# Altium PCB BBB_Board_PLANES.PcbDoc (part 1 of 3)
Units mil, origin at the board's own origin, x right, y up, seen from the top; angles counter-clockwise.
Board outline 11000 x 5000 mil, 2 copper layers (Top Layer, Bottom Layer); 90 components, 379 nets, 1020 pads, 470 vias.
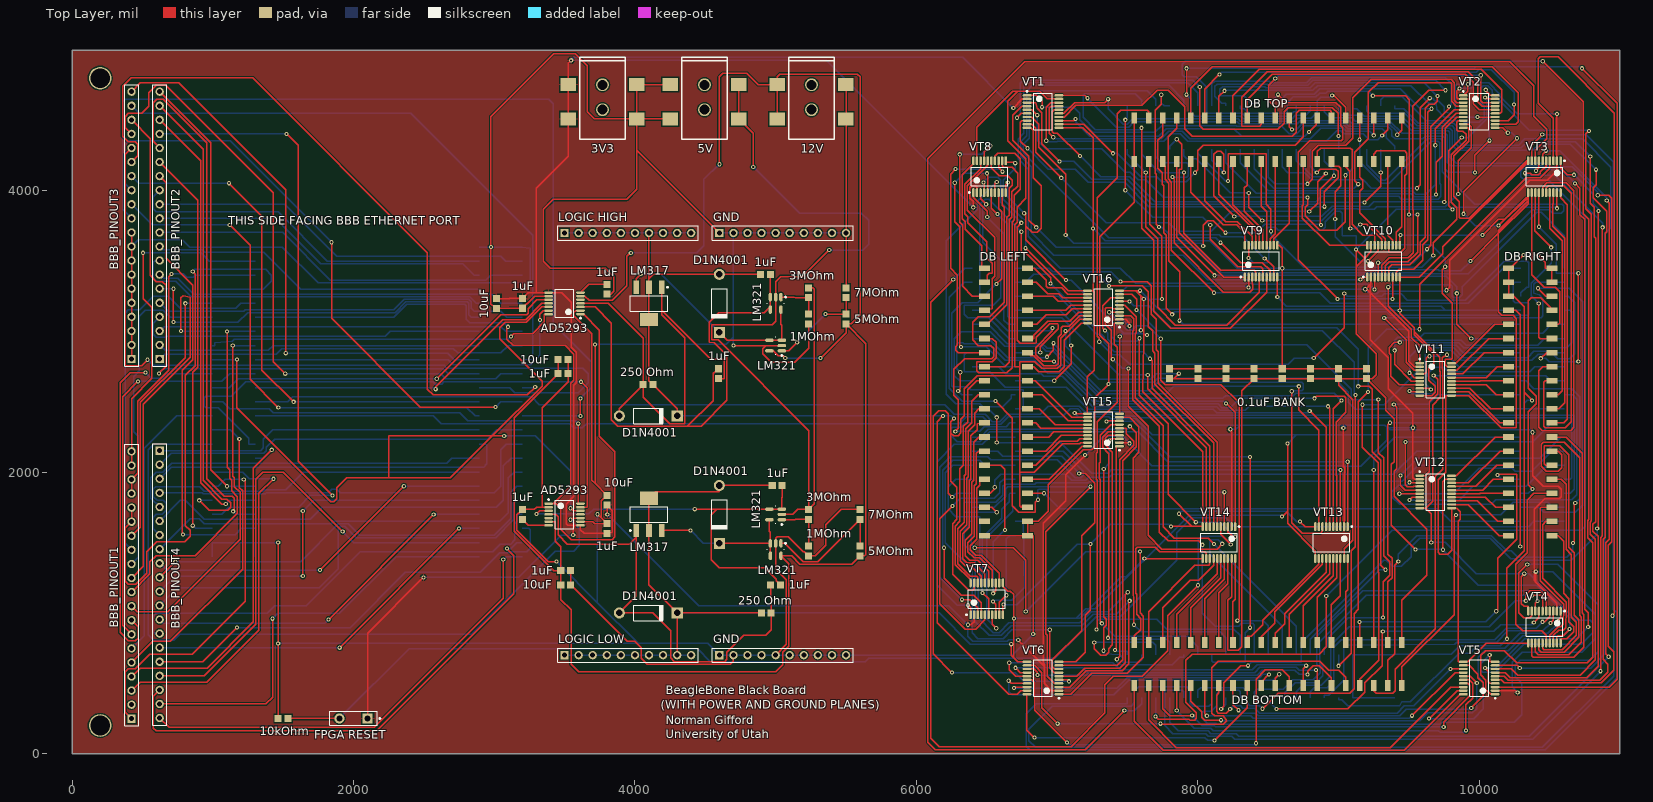
[diagram p0: Top Layer view]
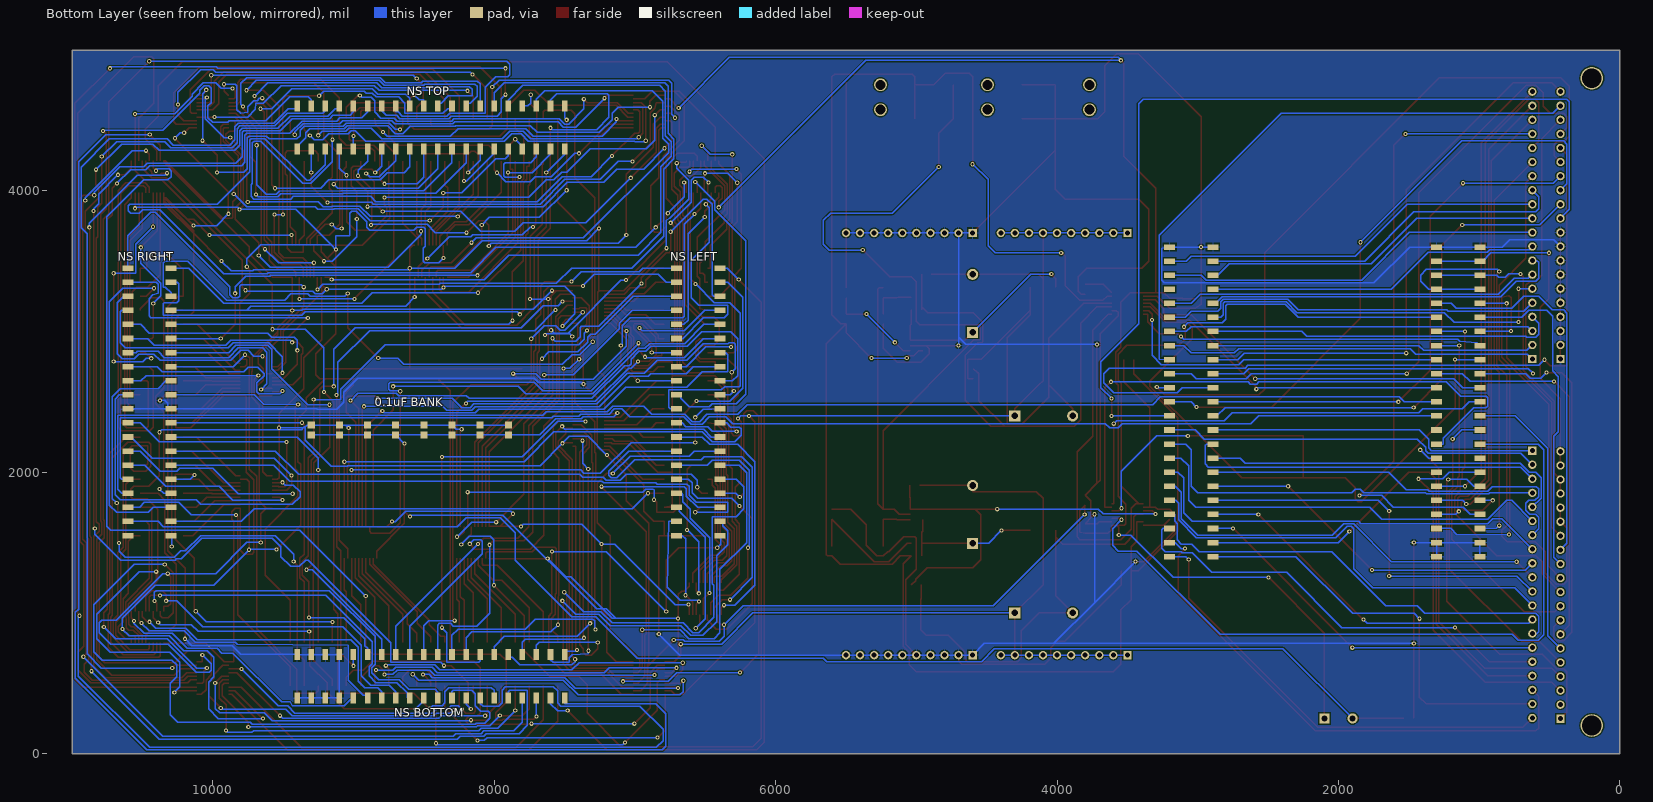
[diagram p1: Bottom Layer view, seen from below]

## Layer stack, top to bottom
Top Solder: solder mask 0.4, Solder Resist, Dk 3.5
Top Layer: signal copper 1.4
Dielectric 1: dielectric 12.6, FR-4, Dk 4.8
Bottom Layer: signal copper 1.4
Bottom Solder: solder mask 0.4, Solder Resist, Dk 3.5

## Board outline
0,0 11000,0 11000,5000 0,5000

## Design rules (kind name [scope] priority, off if disabled: settings)
Clearance DifferentViaPadClearance [IsPad vs IsVia] p1: gap=25
Clearance SameViaPadClearance [IsPad vs IsVia] p2: gap=25
Clearance DifferentViaViaClearance [IsVia vs IsVia] p3: gap=25
Clearance SameViaViaClearance [IsVia vs IsVia] p4: gap=25
Clearance SamePadPadClearance [isPad vs IsPad] p5: gap=6
Clearance DifferentPadPadClearance [IsPad vs IsPad] p6: gap=6
Clearance TrackPadOrViaClearance [IsPad OR IsVia vs IsTrack] p7: gap=10
Clearance SameGeneralClearance [All] p8: gap=8
HoleSize [All] p1: absolutevalues=TRUE maxlimit=150 minlimit=15 maxpercent=80.000 minpercent=20.000
MinimumAnnularRing [All] p1: minimumring=7
MinimumSolderMaskSliver [All] p1: minsoldermaskwidth=4
PolygonConnect [All] p1: connectstyle=Relief reliefconductorwidth=10 reliefentries=4 polygonreliefangle="90 Angle" airgapwidth=10
RoutingCorners [All] p1: cornerstyle=45-Degree minsetback=50 maxsetback=50
RoutingVias [All] p1: holewidth=15 width=30 viastyle="Through Hole" minholewidth=15 minwidth=30 maxholewidth=15 maxwidth=30
SolderMaskExpansion [All] p1: expansion=4
Width [All] p1: maxlimit=10 minlimit=10 preferedwidth=10
27 further rules are at their usual default settings.

## Classes and differential pairs
component class BBB_Board: 3V3 5V 10kOhm 12V BBB_PINOUT1 BBB_PINOUT2 BBB_PINOUT3 BBB_PINOUT4 "FPGA RESET" GND GND1 "LOGIC HIGH" "LOGIC LOW"
component class U_Power_Control2: 1MOhm 1uF 3MOhm "250 Ohm" AD5293 D1N4001 LM317 LM321
component class U_VT_WRP1: VT11
component class U_VT_WRP2: 0.1uF_3_U_VT_WRP2 LT1_U_VT_WRP2 LT2_U_VT_WRP2
component class U_VT_WRP3: LT1_U_VT_WRP3 LT2_U_VT_WRP3
component class U_VT_WRP4: LT1_U_VT_WRP4 LT2_U_VT_WRP4
component class U_VT_WRP5: LT1_U_VT_WRP5 LT2_U_VT_WRP5
component class U_VT_WRP6: 0.1uF_1_U_VT_WRP6 LT1_U_VT_WRP6 LT2_U_VT_WRP6
component class U_VT_WRP7: LT1_U_VT_WRP7 LT2_U_VT_WRP7
component class U_VT_WRP8: LT1_U_VT_WRP8 LT2_U_VT_WRP8
net class IVL_B[127..0]: IVL_B0 IVL_B1 IVL_B2 IVL_B3 IVL_B4 IVL_B5 IVL_B6 IVL_B7 IVL_B8 IVL_B9 IVL_B10 IVL_B11 IVL_B12 IVL_B13 IVL_B14 IVL_B15 IVL_B16 IVL_B17 IVL_B18 IVL_B19 IVL_B20 IVL_B21 IVL_B22 IVL_B23 IVL_B24 IVL_B25 IVL_B26 IVL_B27 IVL_B28 IVL_B29 IVL_B30 IVL_B31 IVL_B32 IVL_B33 IVL_B34 IVL_B35 IVL_B36 IVL_B37 IVL_B38 IVL_B39 IVL_B40 IVL_B41 IVL_B42 IVL_B43 IVL_B44 IVL_B45 IVL_B46 IVL_B47 IVL_B48 IVL_B49 IVL_B50 IVL_B51 IVL_B52 IVL_B53 IVL_B54 IVL_B55 IVL_B56 IVL_B57 IVL_B58 IVL_B59 IVL_B60 IVL_B61 IVL_B62 IVL_B63 IVL_B64 IVL_B65 IVL_B66 IVL_B67 IVL_B68 IVL_B69 IVL_B70 IVL_B71 IVL_B72 IVL_B73 IVL_B74 IVL_B75 IVL_B76 IVL_B77 IVL_B78 IVL_B79 IVL_B80 IVL_B81 IVL_B82 IVL_B83 IVL_B84 IVL_B85 IVL_B86 IVL_B87 IVL_B88 IVL_B89 IVL_B90 IVL_B91 IVL_B92 IVL_B93 IVL_B94 IVL_B95 IVL_B96 IVL_B97 IVL_B98 IVL_B99 IVL_B100 IVL_B101 IVL_B102 IVL_B103 IVL_B104 IVL_B105 IVL_B106 IVL_B107 IVL_B108 IVL_B109 IVL_B110 IVL_B111 IVL_B112 IVL_B113 IVL_B114 IVL_B115 IVL_B116 IVL_B117 IVL_B118 IVL_B119 IVL_B120 IVL_B121 IVL_B122 IVL_B123 IVL_B124 IVL_B125 IVL_B126 IVL_B127
net class OVCC_B[127..0]: OVCC_B0 OVCC_B1 OVCC_B2 OVCC_B3 OVCC_B4 OVCC_B5 OVCC_B6 OVCC_B7 OVCC_B8 OVCC_B9 OVCC_B10 OVCC_B11 OVCC_B12 OVCC_B13 OVCC_B14 OVCC_B15 OVCC_B16 OVCC_B17 OVCC_B18 OVCC_B19 OVCC_B20 OVCC_B21 OVCC_B22 OVCC_B23 OVCC_B24 OVCC_B25 OVCC_B26 OVCC_B27 OVCC_B28 OVCC_B29 OVCC_B30 OVCC_B31 OVCC_B32 OVCC_B33 OVCC_B34 OVCC_B35 OVCC_B36 OVCC_B37 OVCC_B38 OVCC_B39 OVCC_B40 OVCC_B41 OVCC_B42 OVCC_B43 OVCC_B44 OVCC_B45 OVCC_B46 OVCC_B47 OVCC_B48 OVCC_B49 OVCC_B50 OVCC_B51 OVCC_B52 OVCC_B53 OVCC_B54 OVCC_B55 OVCC_B56 OVCC_B57 OVCC_B58 OVCC_B59 OVCC_B60 OVCC_B61 OVCC_B62 OVCC_B63 OVCC_B64 OVCC_B65 OVCC_B66 OVCC_B67 OVCC_B68 OVCC_B69 OVCC_B70 OVCC_B71 OVCC_B72 OVCC_B73 OVCC_B74 OVCC_B75 OVCC_B76 OVCC_B77 OVCC_B78 OVCC_B79 OVCC_B80 OVCC_B81 OVCC_B82 OVCC_B83 OVCC_B84 OVCC_B85 OVCC_B86 OVCC_B87 OVCC_B88 OVCC_B89 OVCC_B90 OVCC_B91 OVCC_B92 OVCC_B93 OVCC_B94 OVCC_B95 OVCC_B96 OVCC_B97 OVCC_B98 OVCC_B99 OVCC_B100 OVCC_B101 OVCC_B102 OVCC_B103 OVCC_B104 OVCC_B105 OVCC_B106 OVCC_B107 OVCC_B108 OVCC_B109 OVCC_B110 OVCC_B111 OVCC_B112 OVCC_B113 OVCC_B114 OVCC_B115 OVCC_B116 OVCC_B117 OVCC_B118 OVCC_B119 OVCC_B120 OVCC_B121 OVCC_B122 OVCC_B123 OVCC_B124 OVCC_B125 OVCC_B126 OVCC_B127
channel class DUT_HEADER: U_DUT_HEADER1 U_DUT_HEADER2 U_DUT_HEADER3 U_DUT_HEADER4
channel class POW_CONT: U_Power_Control1 U_Power_Control2
channel class VT_WRP: U_VT_WRP1 U_VT_WRP2 U_VT_WRP3 U_VT_WRP4 U_VT_WRP5 U_VT_WRP6 U_VT_WRP7 U_VT_WRP8
component class U_Power_Control1: 1MOhm 1uF 3MOhm 10uF "250 Ohm" AD5293 D1N4001 d2 LM321

## Components (designator, comment, footprint, x,y, rotation, side; value= is the part's Value field where it differs from the comment)
0.1uF_0 "0.1uF_0603" 0.1UF_0603 8300,2300 r270 bottom
0.1uF_0 "0.1uF_0603" 0.1UF_0603 9300,2300 r270 bottom
0.1uF_0 "0.1uF_0603" 0.1UF_0603 8900,2300 r270 bottom
0.1uF_0 "0.1uF_0603" 0.1UF_0603 8700,2300 r270 bottom
0.1uF_0 "0.1uF_0603" 0.1UF_0603 8500,2300 r270 bottom
0.1uF_0 "0.1uF_0603" 0.1UF_0603 8100,2300 r270 bottom
0.1uF_0 "0.1uF_0603" 0.1UF_0603 7900,2300 r270 bottom
0.1uF_1 "0.1uF_0603" 0.1UF_0603 9100,2300 r270 bottom
0.1uF_3 "0.1uF_0603" 0.1UF_0603 8800,2700 r90 top
0.1uF_3 "0.1uF_0603" 0.1UF_0603 8600,2700 r90 top
0.1uF_3 "0.1uF_0603" 0.1UF_0603 9000,2700 r90 top
0.1uF_3 "0.1uF_0603" 0.1UF_0603 8200,2700 r90 top
0.1uF_4 "0.1uF_0603" 0.1UF_0603 8400,2700 r90 top
0.1uF_4 "0.1uF_0603" 0.1UF_0603 9200,2700 r90 top
0.1uF_4 "0.1uF_0603" 0.1UF_0603 8000,2700 r90 top
0.1uF_4 "0.1uF_0603" 0.1UF_0603 7800,2700 r90 top
1MOhm "RNCS0603BKE10K0" 0.1UF_0603 5235,1440 r90 top (schematic designator R4)
1MOhm "RNCS0603BKE10K0" 0.1UF_0603 5235,3089 r90 top (schematic designator R4)
1uF "0.1uF_0603" 0.1UF_0603 5000,1200 r180 top (schematic designator 1)
1uF "0.1uF_0603" 0.1UF_0603 4595,2700 r270 top (schematic designator 1)
1uF "0.1uF_0603" 0.1UF_0603 5011,1906 r180 top (schematic designator 2)
1uF "0.1uF_0603" 0.1UF_0603 4928,3406 r180 top (schematic designator 2)
1uF "0.1uF_0603" 0.1UF_0603 3508,1300 r180 top (schematic designator 3)
1uF "0.1uF_0603" 0.1UF_0603 3490,2700 r180 top (schematic designator 4)
1uF "0.1uF_0603" 0.1UF_0603 3200,1700 r270 top (schematic designator 5)
1uF "0.1uF_0603" 0.1UF_0603 3800,3300 r90 top (schematic designator 5)
1uF "0.1uF_0603" 0.1UF_0603 3800,1600 r270 top (schematic designator 6)
1uF "0.1uF_0603" 0.1UF_0603 3200,3200 r90 top (schematic designator 6)
3MOhm "RNCS0603BKE10K0" 0.1UF_0603 5235,1700 r90 top (schematic designator R3)
3MOhm "RNCS0603BKE10K0" 0.1UF_0603 5235,3275 r90 top (schematic designator R3)
3V3 "PJ-002BH-SMT-TR" CP-002BHPJCT-ND 3947,4950 r180 top
5MOhm "RNCS0603BKE10K0" 0.1UF_0603 5600,1440 r270 top (schematic designator R5)
5MOhm "RNCS0603BKE10K0" 0.1UF_0603 5500,3089 r270 top (schematic designator R5)
5V "PJ-002BH-SMT-TR" CP-002BHPJCT-ND 4672,4950 r180 top (schematic designator -5V)
7MOhm "RNCS0603BKE10K0" 0.1UF_0603 5600,1700 r270 top (schematic designator R6)
7MOhm "RNCS0603BKE10K0" 0.1UF_0603 5500,3275 r270 top (schematic designator R6)
10kOhm "RNCS0603BKE10K0" 0.1UF_0603 1500,250 r0 top (schematic designator R1)
10uF "0.1uF_0603" 0.1uF_0603 3017,3199 r90 top (schematic designator 1uF_5)
10uF "0.1uF_0603" 0.1uF_0603 3801,1801 r270 top (schematic designator 1uF_5)
10uF "0.1uF_0603" 0.1UF_0603 3490,2800 r180 top (schematic designator 3)
10uF "0.1uF_0603" 0.1UF_0603 3508,1200 r180 top (schematic designator 4)
12V "PJ-002BH-SMT-TR" CP-002BHPJCT-ND 5432,4950 r180 top (schematic designator 12V.)
"250 Ohm" "RNCS0603BKE10K0" 0.1UF_0603 4933,1000 r180 top (schematic designator R2)
"250 Ohm" "RNCS0603BKE10K0" 0.1UF_0603 4094,2622 r0 top (schematic designator R2)
AD5293 "Digital Pot" DIG_POT 3500,1700 r0 top (schematic designator POT)
AD5293 "Digital Pot" DIG_POT 3500,3200 r180 top (schematic designator POT)
BBB_DOWN "BBB_Pin" BBB_PIN 3200,3600 r180 bottom
BBB_PINOUT1 "Header 20" HDR1X20 423,248 r90 top
BBB_PINOUT2 "Header 20" HDR1X20 623,2804 r90 top
BBB_PINOUT3 "Header 20" HDR1X20 423,2804 r90 top
BBB_PINOUT4 "Header 20" HDR1X20 623,2153 r270 top
D1N4001 "Diode 1N4001" DO-41 4600,1700 r270 top (schematic designator D1)
D1N4001 "Diode 1N4001" DO-41 4600,3200 r270 top (schematic designator D1)
D1N4001 "Diode 1N4001" DO-41 4095,1000 r0 top (schematic designator D2)
D1N4001 "Diode 1N4001" DO-41 4095,2400 r0 top (schematic designator D2)
"DB BOTTOM" "ADAFRUIT_HEADER" FEMALE_HEADER_SMD 8500,637.5 r0 top (schematic designator DUT1)
"DB LEFT" "ADAFRUIT_HEADER" FEMALE_HEADER_SMD 6637.5,2500 r270 top (schematic designator DUT1)
"DB RIGHT" "ADAFRUIT_HEADER" FEMALE_HEADER_SMD 10362.5,2500 r90 top (schematic designator DUT1)
"DB TOP" "ADAFRUIT_HEADER" FEMALE_HEADER_SMD 8500,4362.5 r180 top (schematic designator DUT1)
"FPGA RESET" "SW-PB" SPST-2 2000,250 r180 top (schematic designator S1)
GND "Header 10" HDR1X10 4600,3700 r0 top (schematic designator GND2)
GND "Header 10" HDR1X10 4600,700 r0 top (schematic designator GND1)
LM317 "Voltage Regulator" VOLT_REG 4100,1700 r90 top (schematic designator VR1)
LM317 "Voltage Regulator" VOLT_REG 4100,3200 r270 top (schematic designator VR1)
LM321 "LM321MF/NOPB" OP_AMP 5000,1700 r180 top (schematic designator LM1)
LM321 "LM321MF/NOPB" OP_AMP 5000,3200 r270 top (schematic designator LM1)
LM321 "LM321MF/NOPB" OP_AMP 5000,2900 r180 top (schematic designator LM2)
LM321 "LM321MF/NOPB" OP_AMP 5000,1450 r270 top (schematic designator LM2)
"LOGIC HIGH" "Header 10" HDR1X10 3500,3700 r0 top (schematic designator LOGIC_HIGH)
"LOGIC LOW" "Header 10" HDR1X10 3500,700 r0 top (schematic designator P1)
"NS BOTTOM" "ADAFRUIT_HEADER" FEMALE_HEADER_SMD 8450,550 r0 bottom (schematic designator ETH3)
"NS LEFT" "ADAFRUIT_HEADER" FEMALE_HEADER_SMD 6550,2500 r90 bottom (schematic designator ETH2)
"NS RIGHT" "ADAFRUIT_HEADER" FEMALE_HEADER_SMD 10450,2500 r270 bottom (schematic designator ETH4)
"NS TOP" "ADAFRUIT_HEADER" FEMALE_HEADER_SMD 8450,4450 r180 bottom (schematic designator ETH1)
VT1 "8-Chanel Level Translator" 8-BIT_LEVEL 6900,4562.5 r0 top (schematic designator LT1)
VT2 "8-Chanel Level Translator" 8-BIT_LEVEL 10000,4562.5 r0 top (schematic designator LT2)
VT3 "8-Chanel Level Translator" 8-BIT_LEVEL 10462.5,4100 r270 top (schematic designator LT2)
VT4 "8-Chanel Level Translator" 8-BIT_LEVEL 10462.5,900 r270 top (schematic designator LT1)
VT5 "8-Chanel Level Translator" 8-BIT_LEVEL 10000,537.5 r180 top (schematic designator LT1)
VT6 "8-Chanel Level Translator" 8-BIT_LEVEL 6900,537.5 r180 top (schematic designator LT2)
VT7 "8-Chanel Level Translator" 8-BIT_LEVEL 6500,1100 r90 top (schematic designator LT2)
VT8 "8-Chanel Level Translator" 8-BIT_LEVEL 6520,4100 r90 top (schematic designator LT1)
VT9 "8-Chanel Level Translator" 8-BIT_LEVEL 8450,3500 r90 top (schematic designator LT1)
VT10 "8-Chanel Level Translator" 8-BIT_LEVEL 9320,3500 r90 top (schematic designator LT2)
VT11 "8-Chanel Level Translator" 8-BIT_LEVEL 9690,2660 r0 top (schematic designator LT1)
VT12 "8-Chanel Level Translator" 8-BIT_LEVEL 9690,1860 r0 top (schematic designator LT2)
VT13 "8-Chanel Level Translator" 8-BIT_LEVEL 8950,1500 r270 top (schematic designator LT1)
VT14 "8-Chanel Level Translator" 8-BIT_LEVEL 8150,1500 r270 top (schematic designator LT2)
VT15 "8-Chanel Level Translator" 8-BIT_LEVEL 7330,2300 r180 top (schematic designator LT1)
VT16 "8-Chanel Level Translator" 8-BIT_LEVEL 7330,3175 r180 top (schematic designator LT2)

## Footprints (in the part's own frame and the unit in brackets; to place one, negate y for a bottom-side part, rotate by r counter-clockwise, add the part's x,y. Pads: shape width x height; smd on the part's side, far side on the other; paste and mask are expansions set on the pad)
0.1UF_0603 [mil]
  rect 50x50 smd: 1(-35,0) 2(35,0)
0.1uF_0603 [mil]
  rect 50x50 smd: 1(-35,0) 2(35,0)
8-BIT_LEVEL [mm]
  oval 1.6x0.45 smd: 1(-2.875,2.925) 2(-2.875,2.275) 3(-2.875,1.625) 4(-2.875,0.975) 5(-2.875,0.325) 6(-2.875,-0.325) 7(-2.875,-0.975) 8(-2.875,-1.625) 9(-2.875,-2.275) 10(-2.875,-2.925) 11(2.875,-2.925) 12(2.875,-2.275) 13(2.875,-1.625) 14(2.875,-0.975) 15(2.875,-0.325) 16(2.875,0.325) 17(2.875,0.975) 18(2.875,1.625) 19(2.875,2.275) 20(2.875,2.925)
  silkscreen extent -3,-3.3 1.67,3.77, body extent -2.25,-3.3 2.25,3.3, height 1.1
BBB_PIN [mm]
  rect 2x1 smd: 1(55.986,0) 2(48.186,0) 3(55.986,-2.54) 4(48.186,-2.54) 5(55.986,-5.08) 6(48.186,-5.08) 7(55.986,-7.62) 8(48.186,-7.62) 9(55.986,-10.16) 10(48.186,-10.16) 11(55.986,-12.7) 12(48.186,-12.7) 13(55.986,-15.24) 14(48.186,-15.24) 15(55.986,-17.78) 16(48.186,-17.78) 17(55.986,-20.32) 18(48.186,-20.32) 19(55.986,-22.86) 20(48.186,-22.86) 21(55.986,-25.4) 22(48.186,-25.4) 23(55.986,-27.94) 24(48.186,-27.94) 25(55.986,-30.48) 26(48.186,-30.48) 27(55.986,-33.02) 28(48.186,-33.02) 29(55.986,-35.56) 30(48.186,-35.56) 31(55.986,-38.1) 32(48.186,-38.1) 33(55.986,-40.64) 34(48.186,-40.64) 35(55.986,-43.18) 36(48.186,-43.18) 37(55.986,-45.72) 38(48.186,-45.72) 39(55.986,-48.26) 40(48.186,-48.26) 41(55.986,-50.8) 42(48.186,-50.8) 43(55.986,-53.34) 44(48.186,-53.34) 45(55.986,-55.88) 46(48.186,-55.88) 47(7.8,0) 48(0,0) 49(7.8,-2.54) 50(0,-2.54) 51(7.8,-5.08) 52(0,-5.08) 53(7.8,-7.62) 54(0,-7.62) 56(0,-10.16) 57(7.8,-12.7) 58(0,-12.7) 59(7.8,-15.24) 60(0,-15.24) 61(7.8,-17.78) 62(0,-17.78) 63(7.8,-20.32) 64(0,-20.32) 65(7.8,-22.86) 66(0,-22.86) 67(7.8,-25.4) 68(0,-25.4) 69(7.8,-27.94) 70(0,-27.94) 71(7.8,-30.48) 72(0,-30.48) 73(7.8,-33.02) 74(0,-33.02) 75(7.8,-35.56) 76(0,-35.56) 77(7.8,-38.1) 78(0,-38.1) 79(7.8,-40.64) 80(0,-40.64) 81(7.8,-43.18) 82(0,-43.18) 83(7.8,-45.72) 84(0,-45.72) 85(7.8,-48.26) 86(0,-48.26) 87(7.8,-50.8) 88(0,-50.8) 89(7.8,-53.34) 90(0,-53.34) 91(7.8,-55.88) 92(0,-55.88)
  rect 2x1 smd mask+0.102: 55(7.8,-10.16)
CP-002BHPJCT-ND [mm] "barrel jack"
  rect 2.8x2.4 smd: 1(-1.651,11.176) 1(-1.651,4.953) 2(10.668,4.953) 3(10.668,11.176)
  round 2.311 hole 1.8 unplated: H(4.5,9.5) H(4.5,5)
  silkscreen extent 0.38,0 8.64,14.86
DIG_POT [mm]
  oval 1.55x0.45 smd: 1(-2.875,1.95) 2(-2.875,1.3) 3(-2.875,0.65) 4(-2.875,0) 5(-2.875,-0.65) 6(-2.875,-1.3) 7(-2.875,-1.95) 8(2.875,-1.95) 9(2.875,-1.3) 10(2.875,-0.65) 11(2.875,0) 12(2.875,0.65) 13(2.875,1.3) 14(2.875,1.95)
  silkscreen extent -3,-2.55 1.7,2.8, body extent -2.25,-2.55 2.25,2.55, height 1.2
DO-41 [mm] "Diode, Axial; Body 5.2 x 2.7 mm (LxDia. max), Lead Dia. 0.86 mm (max)"
  round 2 hole 1.2: 1(-5.23,0)
  rect 2x2 hole 1.2: 2(5.23,0)
  silkscreen extent -2.65,-1.4 2.74,1.4
FEMALE_HEADER_SMD [mm]
  rect 1x2 smd: 1(-24.13,-3.9) 2(-21.59,-3.9) 3(-19.05,-3.9) 4(-16.51,-3.9) 5(-13.97,-3.9) 6(-11.43,-3.9) 7(-8.89,-3.9) 8(-6.35,-3.9) 9(-3.81,-3.9) 10(-1.27,-3.9) 11(1.27,-3.9) 12(3.81,-3.9) 13(6.35,-3.9) 14(8.89,-3.9) 15(11.43,-3.9) 16(13.97,-3.9) 17(16.51,-3.9) 18(19.05,-3.9) 19(21.59,-3.9) 20(24.13,-3.9) 21(24.13,3.9) 22(21.59,3.9) 23(19.05,3.9) 24(16.51,3.9) 25(13.97,3.9) 26(11.43,3.9) 27(8.89,3.9) 28(6.35,3.9) 29(3.81,3.9) 30(1.27,3.9) 31(-1.27,3.9) 32(-3.81,3.9) 33(-6.35,3.9) 34(-8.89,3.9) 35(-11.43,3.9) 36(-13.97,3.9) 37(-16.51,3.9) 38(-19.05,3.9) 39(-21.59,3.9) 40(-24.13,3.9)
HDR1X10 [mm] "Connector; Header; 10 Position"
  rect 1.5x1.5 hole 0.9: 1(0,0)
  round 1.5 hole 0.9: 2(2.54,0) 3(5.08,0) 4(7.62,0) 5(10.16,0) 6(12.7,0) 7(15.24,0) 8(17.78,0) 9(20.32,0) 10(22.86,0)
  silkscreen extent -1.27,-1.27 24.13,1.27
HDR1X20 [mm] "Connector; Header; 20 Position"
  rect 1.5x1.5 hole 0.9: 1(0,0)
  round 1.5 hole 0.9: 2(2.54,0) 3(5.08,0) 4(7.62,0) 5(10.16,0) 6(12.7,0) 7(15.24,0) 8(17.78,0) 9(20.32,0) 10(22.86,0) 11(25.4,0) 12(27.94,0) 13(30.48,0) 14(33.02,0) 15(35.56,0) 16(38.1,0) 17(40.64,0) 18(43.18,0) 19(45.72,0) 20(48.26,0)
  silkscreen extent -1.27,-1.27 49.53,1.27
OP_AMP [mm]
  oval 1.55x0.6 smd: 1(-1.125,0.95) 2(-1.125,0) 3(-1.125,-0.95) 4(1.125,-0.95) 5(1.125,0.95)
  silkscreen extent -1.25,-1.55 0.05,1.92, body extent -0.9,-1.55 0.9,1.55, height 1.45
SPST-2 [mm] "Switch; 2 Leads"
  rect 1.85x1.85 hole 1.1: 1(-2.54,0)
  round 1.85 hole 1.1: 2(2.54,0)
  silkscreen extent -4.89,-1.27 4.28,1.27
VOLT_REG [mm] "SOT223, 4-Leads, Body 6.50x7.00mm (avg), Pitch 2.30mm, IPC Medium Density"
  rect 2.4x1 smd: 1(-2.9,2.3) 2(-2.9,0) 3(-2.9,-2.3)
  rect 2.4x3.2 smd: 4(2.9,0)
  silkscreen extent -3.02,-3.35 1.4,3.47, body extent -1.85,-3.35 1.85,3.35, height 1.8

## Part data
1MOhm 1MOhm 3MOhm 3MOhm 5MOhm 5MOhm 7MOhm 7MOhm 10kOhm "250 Ohm" "250 Ohm": "RES 10K OHM 1/16W 0.1% 0603"
3V3 5V 12V: "CONN POWER JACK 2.5X5.5MM HI CUR"
AD5293 AD5293: "IC DGTL POT 1024POS 20K 14TSSOP"
BBB_PINOUT1 BBB_PINOUT2 BBB_PINOUT3 BBB_PINOUT4: "Header, 20-Pin"
D1N4001 D1N4001 D1N4001 D1N4001: "1 Amp General Purpose Rectifier"
"DB BOTTOM" "DB LEFT" "DB RIGHT" "DB TOP" "NS BOTTOM" "NS LEFT" "NS RIGHT" "NS TOP": "Extra tall female header (SMD)"
"FPGA RESET": "Switch"
GND GND "LOGIC HIGH" "LOGIC LOW": "Header, 10-Pin"
LM317 LM317: "IC REG LDO ADJ 1.5A DDPAK"
LM321 LM321 LM321 LM321: "IC OPAMP GP 1MHZ SOT23-5"
VT1 VT2 VT3 VT4 VT5 VT6 VT7 VT8 VT9 VT10 VT11 VT12 VT13 VT14 VT15 VT16: "IC XLATR LEVEL BIDIR 8CH 20TSSOP"

## Free pads (board coordinates)
  round 160 hole 140 unplated: 0(200,200) 0(200,4800)

## Via types
v1: diameter 30, hole 15, Top Layer to Bottom Layer, 470 vias

## Nets (pads, with @x,y where several pads share a name; then routed paths per layer and width w, separated by ;. In a path a pad name is that pad's centre, name@x,y a point inside that pad or via, vN(x,y) a via of type N, cw(c..) or ccw(c..) an arc to the next point about the centre after c; other vN are vias at no path point)
12V_W_U_Power_Control1: 1uF.2@3455,2700 1uF.2@3473,1300 5MOhm.2 10uF.2@3455,2800 10uF.2@3473,1200 12V.2 12V.3 AD5293.6 LM321.5@4955.71,2862.6 LM321.5@5037.4,1405.71 | length 13915.9
  Top Layer w10: AD5293.6@3386.81,1648.82 3431,1648.82 3434,1645.82 3434,1510 3473,1471 1uF.2@3473,1300 ; 10uF.2@3455,2800 1uF.2@3455,2700 3141,2386 3141,1581 3422,1300 1uF.2@3473,1300 ; AD5293.6@3613.19,3251.18 3644.82,3251.18 3674,3222 3839,3222 3943.5,3326.5 3943.5,3533.5 v1@3970,3560 ; v1@4600,4190 4600,4810 4624,4834 4796,4834 4875,4755 12V.2@5012,4755 ; LM321.5@4955.71,2862.6 4983,2862.6 5019.39,2826.21 5052.79,2826.21 v1(5068,2811) ; 12V.3@5012,4510 12V.2@5012,4755 ; v1(5319,2811) 5500,2992 5MOhm.2@5500,3054 ; 1uF.2@3473,1300 10uF.2@3473,1200 3473,1095 3546,1022 3546,635 3600,581 5000,581 5050,631 5050,720 5094,764 5094,1349.11 LM321.5@5037.4,1405.71 5113.29,1405.71 5173,1346 5541,1346 5MOhm.2@5600,1405 5630,1405 5640,1415 5640,2914 5MOhm.2@5500,3054 ; 12V.2@5012,4755 5012,4811 5030,4829 5581,4829 5600,4810 5600,3118 5536,3054 5MOhm.2@5500,3054
  Bottom Layer w10: v1(3971,3558) 4438,3558 4490,3610 4490,4080 v1@4600,4190 ; v1(5068,2811) v1(5319,2811)
  other v1: 4601,4188
-5V_W_U_Power_Control1: 3MOhm.2 5V.1 LM321.2@5000,3244.29 LM321.2@5044.29,1700 | length 6747
  Top Layer w10: 5V.1@4737,4755 5V.1@4737,4510 4840,4407 v1@4840,4172 ; LM321.2@5044.29,1700 5122,1700 5157,1735 3MOhm.2@5235,1735 ; 3MOhm.2@5235,3310 5265,3310 5275,3300 5275,1775 3MOhm.2@5235,1735 ; v1@5380,3580 5190,3390 5035,3390 5000,3355 LM321.2@5000,3244.29 5000,3071 4977.47,3048.47 4545.63,3048.47 4545.63,2939.72 4591.28,2939.72 5235,2296 3MOhm.2@5235,1735
  Bottom Layer w10: v1@4840,4170 5170,3840 5610,3840 5660,3790 5660,3620 5618,3578 v1(5381,3578)
  other v1: 4841,4168
BBB_\GND_ADC: BBB_DOWN.34
BBB_AIN0: BBB_DOWN.39 BBB_PINOUT2.17 | length 4515.7
  Top Layer w10: v1(1525,4404) 1606,4323 1606,2079 v1(1850,1835)
  Bottom Layer w10: BBB_PINOUT2.17@623,4404 v1(1525,4404) ; BBB_DOWN.39@995.83,1700 1063.28,1700 1115.28,1752 1610,1752 1693,1835 v1(1850,1835)
BBB_AIN1: BBB_DOWN.40 BBB_PINOUT2.16 | length 3760.9
  Top Layer w10: BBB_PINOUT2.16@623,4304 576,4351 576,4624.53 601.47,4650 648.53,4650 958,4340.53 958,1954 1082,1830 1137,1830 1151,1816 1151,1728 v1(1145,1722)
  Bottom Layer w10: v1(1145,1722) 1167,1700 BBB_DOWN.40@1302.91,1700
BBB_AIN2: BBB_DOWN.37 BBB_PINOUT2.19 | length 3435.7
  Top Layer w10: BBB_PINOUT2.19@623,4604 931,4296 931,1943 1065,1809 1101,1809 1127.28,1782.72 1127.28,1752 1105.28,1730 973.75,1730 v1(903.75,1800)
  Bottom Layer w10: v1(903.75,1800) BBB_DOWN.37@995.83,1800
BBB_AIN3: BBB_DOWN.38 BBB_PINOUT2.18 | length 3163.1
  Top Layer w10: BBB_PINOUT2.18@623,4504 913,4214 913,1923.68 1062.68,1774 v1(1092,1774)
  Bottom Layer w10: v1(1092,1774) 1118,1800 BBB_DOWN.38@1302.91,1800
BBB_AIN4: BBB_DOWN.33 BBB_PINOUT1.3 | length 2656.6
  Top Layer w10: BBB_PINOUT1.3@423,448 483,508 957.55,508 1328,878.45 1328,1849 v1(1432,1953)
  Bottom Layer w10: BBB_DOWN.33@995.83,2000 1213,2000 1260,1953 v1(1432,1953)
BBB_AIN5: BBB_DOWN.36 BBB_PINOUT2.20 | length 3203.3
  Top Layer w10: BBB_PINOUT2.20@623,4704 986,4341 986,2016 v1(1102,1900)
  Bottom Layer w10: v1(1102,1900) BBB_DOWN.36@1302.91,1900
BBB_AIN6: BBB_DOWN.35 BBB_PINOUT1.1 | length 2530.5
  Top Layer w10: BBB_PINOUT1.1@423,248 377,294 377,580.47 398.53,602 450,602 554,706 855.72,706 1232,1082.28 1232,1937 v1(1220,1949)
  Bottom Layer w10: BBB_DOWN.35@995.83,1900 1040,1900 1089,1949 v1(1220,1949)
BBB_DCS_DATA1: BBB_DOWN.92 BBB_PINOUT4.20 | length 3269.3
  Top Layer w10: BBB_PINOUT4.20@623,253 690,186 2146.09,186 3064,1103.91 v1(3064,1380)
  Bottom Layer w10: v1(3064,1380) 3084,1400 BBB_DOWN.92@3200,1400
BBB_ECAPWMO: BBB_DOWN.42 BBB_PINOUT2.14 | length 3211.1
  Top Layer w10: BBB_PINOUT2.14@623,4104 669,4058 669,3519.02 858,3330.02 858,2799.48 781.68,2723.16 781.68,1563.68 v1(788.36,1557)
  Bottom Layer w10: v1(788.36,1557) 1159,1557 1202,1600 BBB_DOWN.42@1302.91,1600
BBB_EHRPWM1A: BBB_DOWN.14 BBB_PINOUT1.10 | length 2556.5
  Top Layer w10: BBB_PINOUT1.10@423,1148 554,1279 554,1362 599,1407 875,1407 1175.28,1707.28 1175.28,1826.67 1134,1867.95 1134,1942.97 1120,1956.97 1120,2017 1102,2035 v1(1102,3000)
  Bottom Layer w10: v1(1102,3000) BBB_DOWN.14@1302.91,3000
BBB_EHRPWM1B: BBB_DOWN.16 BBB_PINOUT1.9 | length 2561.8
  Top Layer w10: BBB_PINOUT1.9@423,1048 464,1007 679,1007 1194,1522 1194,1855.75 1153,1896.75 1153,1959.97 1142,1970.97 v1(1142,2900)
  Bottom Layer w10: v1(1142,2900) BBB_DOWN.16@1302.91,2900
BBB_EHRPWM2A: BBB_DOWN.65 BBB_PINOUT3.18 | length 4250.7
  Top Layer w10: BBB_PINOUT3.18@423,4504 556,4371 556,3399 600,3355 640,3355 668,3327 668,2752 v1(618,2702)
  Bottom Layer w10: v1(618,2702) 651,2735 2636.75,2735 2671.75,2700 BBB_DOWN.65@2892.91,2700
BBB_EHRPWM2B: BBB_DOWN.59 BBB_PINOUT2.4 | length 2484.9
  Bottom Layer w10: BBB_PINOUT2.4@623,3104 577,3058 577,2981 600,2958 661,2958 668,2965 2225,2965 2260,3000 BBB_DOWN.59@2892.91,3000
BBB_GND_ADC: BBB_PINOUT1.2
BBB_GPIO_20: BBB_DOWN.41 BBB_PINOUT2.15 | length 2857.3
  Top Layer w10: BBB_PINOUT2.15@623,4204 894,3933 894,2746.59 858,2710.59 v1(858,1620)
  Bottom Layer w10: v1(858,1620) 878,1600 BBB_DOWN.41@995.83,1600
BBB_GPIO_26: BBB_DOWN.60 BBB_PINOUT2.3 | length 2604.3
  Bottom Layer w10: BBB_PINOUT2.3@623,3004 654,3035 3047,3035 3082,3000 BBB_DOWN.60@3200,3000
BBB_GPIO_27: BBB_DOWN.63 BBB_PINOUT3.20 | length 3990.3
  Top Layer w10: BBB_PINOUT3.20@423,4704 486,4767 758,4767 1519,4006 v1(1519,2846)
  Bottom Layer w10: v1(1519,2846) 2670,2846 2716,2800 BBB_DOWN.63@2892.91,2800
BBB_GPIO_44: BBB_DOWN.58 BBB_PINOUT2.5 | length 2718.3
  Bottom Layer w10: BBB_PINOUT2.5@623,3204 685,3142 1219.86,3142 1230.86,3153 2285,3153 2360,3228 2820,3228 2836,3212 2836,3166 2860,3142 3047,3142 3089,3100 BBB_DOWN.58@3200,3100
BBB_GPIO_45: BBB_DOWN.57 BBB_PINOUT2.6 | length 2660.5
  Top Layer w10: v1(721,3068) v1(721,3304)
  Bottom Layer w10: BBB_PINOUT2.6@623,3304 v1(721,3304) ; v1(721,3068) 725,3064 1177.31,3064 1248,3134.69 2296.69,3134.69 2372,3210 2808,3210 2818,3200 2818,3120 2838,3100 BBB_DOWN.57@2892.91,3100
BBB_GPIO_46: BBB_DOWN.62 BBB_PINOUT2.1 | length 2641.1
  Bottom Layer w10: BBB_PINOUT2.1@623,2804 657.31,2838.31 1450.68,2838.31 1489,2876.64 2710.68,2876.64 2740,2847.31 3047,2847.31 3099.69,2900 BBB_DOWN.62@3200,2900
BBB_GPIO_47: BBB_DOWN.61 BBB_PINOUT2.2 | length 2300.6
  Bottom Layer w10: BBB_PINOUT2.2@623,2904 662,2865 1394.69,2865 1429.69,2900 BBB_DOWN.61@2892.91,2900
BBB_GPIO_60: BBB_DOWN.13 BBB_PINOUT1.11 | length 2702.2
  Top Layer w10: BBB_PINOUT1.11@423,1248 506,1331 506,2483.79 840,2817.79 840,3244 789,3255 774,3240 v1(774,3003)
  Bottom Layer w10: v1(774,3003) 777,3000 BBB_DOWN.13@995.83,3000
BBB_GPIO_61: BBB_DOWN.72 BBB_PINOUT3.11 | length 6706.7
  Top Layer w10: v1(3613,2400) v1(3613,2524)
  Bottom Layer w10: BBB_PINOUT3.11@423,3804 360,3867 360,4631 378,4649 3388,4649 3420,4617 3420,3054 3689,2785 3689,2600 v1(3613,2524) ; BBB_DOWN.72@3200,2400 v1(3613,2400)
BBB_GPIO_65: BBB_DOWN.64 BBB_PINOUT3.19 | length 4184.8
  Bottom Layer w10: BBB_PINOUT3.19@423,4604 477,4550 2408,4550 3273,3685 3273,2804 BBB_DOWN.64@3200,2800
BBB_GPIO_66: BBB_DOWN.53 BBB_PINOUT2.9 | length 2395.8
  Bottom Layer w10: BBB_PINOUT2.9@623,3604 646,3581 925,3581 942,3564 1363,3564 1627,3300 BBB_DOWN.53@2892.91,3300
BBB_GPIO_67: BBB_DOWN.54
BBB_GPIO_68: BBB_DOWN.56 BBB_PINOUT2.7 | length 2661.5
  Bottom Layer w10: BBB_PINOUT2.7@623,3404 650,3377 753,3377 866,3264 2983,3264 3047,3200 BBB_DOWN.56@3200,3200
BBB_GPIO_69: BBB_DOWN.55 BBB_PINOUT2.8 | length 2554
  Bottom Layer w10: BBB_PINOUT2.8@623,3504 590,3504 577,3491 577,3378 598,3357 737,3357 848,3246 2828,3246 2874,3200 BBB_DOWN.55@2892.91,3200
BBB_GPIO_115: BBB_DOWN.27 BBB_PINOUT1.5 | length 2218.7
  Top Layer w10: BBB_PINOUT1.5@423,648 573,798 699,798 1213,1312 1213,1867 1189,1891 v1(1189,2236)
  Bottom Layer w10: BBB_DOWN.27@995.83,2300 1125,2300 v1(1189,2236)
BBB_GPIO_117: BBB_DOWN.25 BBB_PINOUT1.6 | length 2036.2
  Bottom Layer w10: BBB_PINOUT1.6@423,748 514,839 514,2169.06 744.94,2400 BBB_DOWN.25@995.83,2400
BBB_I2C2_SCL: BBB_DOWN.19 BBB_PINOUT1.8 | length 2793.2
  Top Layer w10: BBB_PINOUT1.8@423,948 469,902 469,821 450,802 401,802 341,862 341,2634 415,2708 v1(523,2708)
  Bottom Layer w10: v1(523,2708) 562,2669 638,2669 669,2700 BBB_DOWN.19@995.83,2700
BBB_I2C_SDA: BBB_DOWN.20 BBB_PINOUT1.7 | length 2725.5
  Top Layer w10: BBB_PINOUT1.7@423,848 360,911 360,2537 v1(468,2645)
  Bottom Layer w10: v1(468,2645) 1065,2645 1120,2700 BBB_DOWN.20@1302.91,2700
BBB_LCD_AC_BIAS: BBB_DOWN.76 BBB_PINOUT4.4 | length 2899.6
  Bottom Layer w10: BBB_PINOUT4.4@623,1853 927,1853 933,1847 1374.97,1847 1380.97,1853 1820.38,1853 1846.41,1879.03 1880.38,1879.03 1906.41,1853 3000,1853 3047,1900 3047,2160 3087,2200 BBB_DOWN.76@3200,2200
BBB_LCD_DATA0: BBB_DOWN.91 BBB_PINOUT4.19 | length 3031.1
  Top Layer w10: BBB_PINOUT4.19@623,353 1378,353 1425,400 v1(1425,959)
  Bottom Layer w10: v1(1425,959) 1463,997 1899.62,997 2302.62,1400 BBB_DOWN.91@2892.91,1400
BBB_LCD_DATA2: BBB_DOWN.89 BBB_PINOUT4.17 | length 3681.2
  Top Layer w10: BBB_PINOUT4.17@623,553 940,553 1307,920 1307,1951 1357,2001 1500,2001 v1(1923,1578)
  Bottom Layer w10: v1(1923,1578) 2001,1500 BBB_DOWN.89@2892.91,1500
BBB_LCD_DATA3: BBB_DOWN.90 BBB_PINOUT4.18 | length 3734.7
  Top Layer w10: BBB_PINOUT4.18@623,453 577,407 577,181 597,161 2164,161 3139.5,1136.5 3139.5,1407.5 v1(3090,1457)
  Bottom Layer w10: v1(3090,1457) 3117,1457 3160,1500 BBB_DOWN.90@3200,1500
BBB_LCD_DATA4: BBB_DOWN.87 BBB_PINOUT4.15 | length 2620.8
  Top Layer w10: v1(1902,753) v1(2749,1600)
  Bottom Layer w10: BBB_PINOUT4.15@623,753 v1(1902,753) ; v1(2749,1600) BBB_DOWN.87@2892.91,1600
BBB_LCD_DATA5: BBB_DOWN.88 BBB_PINOUT4.16 | length 3155.4
  Top Layer w10: BBB_PINOUT4.16@623,653 929,653 v1(1172,896)
  Bottom Layer w10: v1(1172,896) 1976,896 2368,1288 2902,1288 3040.95,1426.95 3111.3,1426.95 3119.35,1435 3230,1435 3255,1460 3255,1590 3245,1600 BBB_DOWN.88@3200,1600
BBB_LCD_DATA6: BBB_DOWN.85 BBB_PINOUT4.13 | length 2601.2
  Top Layer w10: v1(1823,953) v1(2570,1700)
  Bottom Layer w10: BBB_PINOUT4.13@623,953 649.44,926.56 1796.56,926.56 v1(1823,953) ; v1(2570,1700) BBB_DOWN.85@2892.91,1700
BBB_LCD_DATA7: BBB_DOWN.86 BBB_PINOUT4.14 | length 3179.4
  Bottom Layer w10: BBB_PINOUT4.14@623,853 590,853 577,866 577,975 600,998 1387,998 1440,1051 1663,1051 2048,1436 2988.84,1436 3041.98,1489.15 3116.46,1489.15 3145.63,1518.31 3145.63,1635 3164,1653.37 3164,1700 BBB_DOWN.86@3200,1700
BBB_LCD_DATA8: BBB_DOWN.83 BBB_PINOUT4.11 | length 2808.5
  Top Layer w10: v1(1640,1262) v1(1640,1724)
  Bottom Layer w10: BBB_PINOUT4.11@623,1153 732,1262 v1(1640,1262) ; v1(1640,1724) 1716,1800 BBB_DOWN.83@2892.91,1800
BBB_LCD_DATA9: BBB_DOWN.84 BBB_PINOUT4.12 | length 3189.4
  Bottom Layer w10: BBB_PINOUT4.12@623,1053 749,1179 1757.62,1179 1892,1313.38 1892,1599 1908,1615 1939,1615 2019.31,1534.69 3009.63,1534.69 3137,1662.06 3137,1780 3157,1800 BBB_DOWN.84@3200,1800
BBB_LCD_DATA10: BBB_DOWN.82 BBB_PINOUT4.10 | length 3021.6
  Top Layer w10: BBB_PINOUT4.10@623,1253 v1(734,1364)
  Bottom Layer w10: v1(734,1364) 1623.62,1364 1892.62,1633 1963.52,1633 2043.52,1553 3001.31,1553 3119,1670.69 3119,1859 3160,1900 BBB_DOWN.82@3200,1900
BBB_LCD_DATA11: BBB_DOWN.80 BBB_PINOUT4.8 | length 2977.8
  Bottom Layer w10: BBB_PINOUT4.8@623,1453 840,1670 905,1670 940,1635 1840.62,1635 1856.62,1651 3040,1651 3101,1712 3101,1960 3141,2000 BBB_DOWN.80@3200,2000
BBB_LCD_DATA12: BBB_DOWN.81 BBB_PINOUT4.9 | length 2537.1
  Top Layer w10: v1(1762,1304) v1(2358,1900)
  Bottom Layer w10: BBB_PINOUT4.9@623,1353 672,1304 v1(1762,1304) ; v1(2358,1900) BBB_DOWN.81@2892.91,1900
BBB_LCD_DATA13: BBB_DOWN.79 BBB_PINOUT4.7 | length 2864.5
  Bottom Layer w10: BBB_PINOUT4.7@623,1553 577,1599 577,1679 599,1701 640,1701 669,1730 669,1779 649,1799 605,1799 578,1826 578,1882 594,1898 908.31,1898 941,1865.31 1357,1865.31 1367.69,1876 1520,1876 1644,2000 BBB_DOWN.79@2892.91,2000
BBB_LCD_DATA14: BBB_DOWN.77 BBB_PINOUT4.5 | length 2624.6
  Bottom Layer w10: BBB_PINOUT4.5@623,1753 560,1816 560,1961 600,2001 644,2001 708,2065 2664,2065 2699,2100 BBB_DOWN.77@2892.91,2100
BBB_LCD_DATA15: BBB_DOWN.78 BBB_PINOUT4.6 | length 3017.5
  Bottom Layer w10: BBB_PINOUT4.6@623,1653 770,1800 806,1800 941,1665 1694,1665 1779,1750 3015,1750 3065,1800 3065,2045 3120,2100 BBB_DOWN.78@3200,2100
BBB_LCD_HSYNC: BBB_DOWN.75 BBB_PINOUT4.3 | length 2558.5
  Bottom Layer w10: BBB_PINOUT4.3@623,1953 706,2036 2924,2036 2948,2060 2948,2190 2938,2200 BBB_DOWN.75@2892.91,2200
BBB_LCD_PCLK: BBB_DOWN.74 BBB_PINOUT4.2 | length 2692.8
  Bottom Layer w10: BBB_PINOUT4.2@623,2053 705,2135 1362,2135 1380,2153 1380,2176 1439,2235 2954,2235 3019,2300 BBB_DOWN.74@3200,2300
BBB_LCD_VSYNC: BBB_DOWN.73 BBB_PINOUT4.1 | length 2366
  Bottom Layer w10: BBB_PINOUT4.1@623,2153 1340,2153 1360,2173 1360,2233 1427,2300 BBB_DOWN.73@2892.91,2300
BBB_MMC1_CLK: BBB_DOWN.67 BBB_PINOUT3.16 | length 5798.7
  Top Layer w10: BBB_PINOUT3.16@423,4304 377,4258 377,2760 379,2758 496,2758 v1(537,2799)
  Bottom Layer w10: v1(537,2799) 577,2759 2644,2759 2663,2740 3628,2740 3669,2699 3669,2635 3598,2564 3146,2564 3110,2600 BBB_DOWN.67@2892.91,2600
BBB_MMC1_CMD: BBB_DOWN.66 BBB_PINOUT3.17 | length 4692
  Top Layer w10: BBB_PINOUT3.17@423,4404 378.47,4448.53 378.47,4527 400.47,4549 495,4549 546,4600 546,4695 599.53,4748.53 667,4748.53 1430,3985.53 1430,2785 v1(1515,2700)
  Bottom Layer w10: v1(1515,2700) 2620,2700 2656,2664 3011,2664 3047,2700 BBB_DOWN.66@3200,2700
BBB_MMC1_DAT0: BBB_DOWN.71 BBB_PINOUT3.12 | length 3651.1
  Top Layer w10: v1(1121,3757) 1265,3613 1265,2660 v1(1466,2459)
  Bottom Layer w10: BBB_PINOUT3.12@423,3904 570,3757 v1(1121,3757) ; v1(1466,2459) 2806,2459 2865,2400 BBB_DOWN.71@2892.91,2400
BBB_MMC1_DAT1: BBB_DOWN.70 BBB_PINOUT3.13 | length 4292.7
  Top Layer w10: v1(1844,3634) 1844,3094 2475,2463 v1(3010,2463)
  Bottom Layer w10: BBB_PINOUT3.13@423,4004 378,4049 378,4332 400,4354 1124,4354 v1(1844,3634) ; v1(3010,2463) 3047,2500 BBB_DOWN.70@3200,2500
BBB_MMC1_DAT2: BBB_DOWN.51 BBB_PINOUT2.11 | length 2437.3
  Bottom Layer w10: BBB_PINOUT2.11@623,3804 1445.39,3804 1768.39,3481 2775.54,3481 2856.54,3400 BBB_DOWN.51@2892.91,3400
BBB_MMC1_DAT3: BBB_DOWN.52 BBB_PINOUT2.10 | length 2731.7
  Bottom Layer w10: BBB_PINOUT2.10@623,3704 1497,3704 1835.69,3365.31 2939.31,3365.31 2974,3400 BBB_DOWN.52@3200,3400
BBB_MMC1_DAT4: BBB_DOWN.69 BBB_PINOUT3.14 | length 3775.2
  Top Layer w10: v1(1115,4054) 1349,3820 1349,2726 v1(1575,2500)
  Bottom Layer w10: BBB_PINOUT3.14@423,4104 473,4054 v1(1115,4054) ; v1(1575,2500) BBB_DOWN.69@2892.91,2500
BBB_MMC1_DAT5: BBB_DOWN.68 BBB_PINOUT3.15 | length 5204
  Top Layer w10: BBB_PINOUT3.15@423,4204 468,4249 468,4331 449,4350 399,4350 360,4389 360,4742 420,4802 1285,4802 2526,3561 2526,2590 2566,2550 3236,2550 v1(3291,2605)
  Bottom Layer w10: BBB_DOWN.68@3200,2600 3286,2600 v1(3291,2605)
BBB_MMC1_DAT6: BBB_DOWN.49 BBB_PINOUT2.13 | length 2621.1
  Bottom Layer w10: BBB_PINOUT2.13@623,4004 577,3958 577,3872 599,3850 1465,3850 1815,3500 BBB_DOWN.49@2892.91,3500
BBB_MMC1_DAT7: BBB_DOWN.50 BBB_PINOUT2.12 | length 2744.3
  Bottom Layer w10: BBB_PINOUT2.12@623,3904 1513,3904 1882,3535 3047,3535 3082,3500 BBB_DOWN.50@3200,3500
BBB_PWR_BUT: BBB_DOWN.9 BBB_PINOUT1.14 | length 2001.1
  Top Layer w10: BBB_PINOUT1.14@423,1548 485.53,1610.53 485.53,2495.53 805,2815 v1(805,3200)
  Bottom Layer w10: v1(805,3200) BBB_DOWN.9@995.83,3200
BBB_SYS_5V: BBB_DOWN.7 BBB_DOWN.8 BBB_PINOUT1.15 BBB_PINOUT1.16 | length 4243.4
  Top Layer w10: BBB_PINOUT1.16@423,1748 BBB_PINOUT1.15@423,1648 378.47,1603.47 378.47,1225 400.47,1203 451.16,1203 530,1281.84 530,1433 602.9,1505.9 800,1505.9 840,1545.9 840,1585.9 805.9,1620 805.9,2687.9 876,2758 876,3408 v1(858,3426)
  Bottom Layer w10: v1(858,3426) 873,3441 1376,3441 1417,3400 1417,3357 1360,3300 BBB_DOWN.8@1302.91,3300 BBB_DOWN.7@995.83,3300
BBB_SYS_RST: BBB_DOWN.10 BBB_PINOUT1.13 | length 2727.8
  Bottom Layer w10: BBB_PINOUT1.13@423,1448 377,1494 377,3131 400,3154 482,3154 578,3250 684,3250 770,3164 1162,3164 1198,3200 BBB_DOWN.10@1302.91,3200
BBB_UART4_RXD: BBB_DOWN.11 BBB_PINOUT1.12 | length 2363.8
  Bottom Layer w10: BBB_PINOUT1.12@423,1348 469,1394 469,2256 438,2287 438,2680 479,2721 479,3108 521,3150 649,3150 699,3100 BBB_DOWN.11@995.83,3100
BBB_VDD_3V3: BBB_DOWN.3 BBB_DOWN.4 BBB_PINOUT1.19 BBB_PINOUT1.20 | length 2419.5
  Top Layer w10: BBB_PINOUT1.19@423,2048 BBB_PINOUT1.20@423,2148 423,2522 568,2667 568,3171 505,3234 v1(505,3559)
  Bottom Layer w10: v1(505,3559) 917,3559 976,3500 BBB_DOWN.3@995.83,3500 BBB_DOWN.4@1302.91,3500
BBB_VDD_5V: BBB_DOWN.5 BBB_DOWN.6 BBB_PINOUT1.17 BBB_PINOUT1.18 | length 2292.3
  Top Layer w10: BBB_PINOUT1.17@423,1848 BBB_PINOUT1.18@423,1948 467.53,1992.53 467.53,2504.53 687,2724 687,3390 v1(706,3409)
  Bottom Layer w10: v1(706,3409) 790.83,3409 816,3383.83 859.83,3383.83 876,3400 BBB_DOWN.5@995.83,3400 BBB_DOWN.6@1302.91,3400
BBB_VDD_ADC: BBB_DOWN.32 BBB_PINOUT1.4 | length 2443.5
  Top Layer w10: BBB_PINOUT1.4@423,548 483,608 960.08,608 1288,935.92 1288,2028 v1(1419,2159)
  Bottom Layer w10: BBB_DOWN.32@1302.91,2100 1360,2100 v1(1419,2159)
COUNTER_CLK0: "DB TOP.24" "NS RIGHT.35" | length 3440.6
  Top Layer w10: 7850,4208.96 7850,3668 v1(8119,3399) ; v1(9840.57,3271) 9840.57,3052.43 v1(9943,2950)
  Bottom Layer w10: v1(8119,3399) 9589.65,3399 9595.65,3393 9766,3393 9840.57,3318.43 v1(9840.57,3271) ; v1(9943,2950) 10296.46,2950
COUNTER_CLK1: "DB BOTTOM.24" "NS RIGHT.25" | length 2496.3
  Top Layer w10: 9150,791.04 v1(9150,936) ; v1(10121,1012) 10132,1023 10132,1389 10265,1522 10265,1984 10263,1986 10136,1986 v1(10130,1980)
  Bottom Layer w10: v1(9150,936) 10045,936 v1(10121,1012) ; v1(10130,1980) 10160,1950 10296.46,1950
COUNTER_CLK2: "DB LEFT.24" "NS RIGHT.22" | length 3588.3
  Top Layer w10: 6791.04,1850 v1(6908,1850)
  Bottom Layer w10: v1(6908,1850) 7017.5,1740.5 9705.48,1740.5 9795.98,1650 10296.46,1650
COUNTER_CLK3: "DB RIGHT.24" "NS RIGHT.21" | length 1827.9
  Top Layer w10: 10208.96,3150 10261,3150 10291,3120 v1(10291,1471)
  Bottom Layer w10: v1(10291,1471) 10291,1550 10296.46,1550
COUNTER_CLR: "DB TOP.23" "NS RIGHT.36" | length 3630.1
  Top Layer w10: 7750,4208.96 7750,4172.58 7768.5,4172.58 7768.5,4080 7794,4054.5 7794,3501 7870,3425 v1(7870,3077)
  Bottom Layer w10: v1(7870,3077) 7897,3050 10296.46,3050
DIN0: AD5293.10@3386.81,3225.59 BBB_DOWN.21 | length 2669.9
  Top Layer w10: v1(2592,2664) 3047,3119 3230.38,3119 3240.67,3129.29 3240.67,3163.14 3303.12,3225.59 AD5293.10@3386.81,3225.59
  Bottom Layer w10: BBB_DOWN.21@995.83,2600 1117,2600 1181,2664 v1(2592,2664)
DIN1: AD5293.10@3613.19,1674.41 BBB_DOWN.29 | length 5428.5
  Top Layer w10: v1(3543,1662) 3555.41,1674.41 AD5293.10@3613.19,1674.41
  Bottom Layer w10: BBB_DOWN.29@995.83,2200 581,2200 542,2161 542,844 579,807 724,807 764,847 2841,847 3434,1440 3566,1440 3606,1480 3606,1599 v1(3543,1662)
EN: "DB TOP.22" "NS RIGHT.37" VT1.10 VT2.10 VT3.10 VT4.10 VT5.10 VT6.10 VT7.10 VT8.10 VT9.10 VT10.10 VT11.10 VT12.10 VT13.10 VT14.10 VT15.10 VT16.10 | length 23360
  Top Layer w10: VT7.10@6615.16,986.81 6615.16,1054.16 v1(6620,1059) ; VT8.10@6635.16,3986.81 6635.16,4044.16 v1(6650,4059) ; v1(6766,3840) 6777,3829 6777,3748.87 ; VT1.10@6786.81,4447.34 6813,4447.34 6830,4430.34 6830,4093 6888.54,4034.46 6888.54,3732 6860,3703.46 6822.41,3703.46 6777,3748.87 ; VT6.10@7013.19,652.66 7131.66,652.66 7199,720 7199,982 7237,1020 v1(7237,1489) ; v1(7063,3365) 6777,3651 6777,3748.87 ; VT15.10@7443.19,2415.16 7445,2415.16 v1(7445,2965.07) ; VT16.10@7443.19,3290.16 7560,3290.16 ; v1(7590,3290) 7589.84,3290.16 7560,3290.16 ; v1(7595,3009) 7595,3255.16 ; v1(7616,3230) 7616,2975 ; v1(7639,2975) 7616,2975 ; 7650,4208.96 7650,4189 7660,4189 7660,3762 7745,3677 v1(7745,3230) ; v1(7810.06,1614.94) 7955.52,1614.94 ; v1(7865.5,1704.96) 7955.52,1614.94 ; VT14.10@8034.84,1613.19 VT14.10@8034.84,1614.94 ; v1(8565.16,3245) VT9.10@8565.16,3386.81 ; v1(8726,1649) 8762,1613 8834.84,1613 VT13.10@8834.84,1613.19 ; VT10.10@9435.16,3386.81 VT10.10@9435.16,3386 ; VT12.10@9576.81,1744.84 9620,1744.84 ; VT11.10@9576.81,2544.84 9664,2544.84 9686,2566.84 9686,2611 9642,2655 9642,2735.94 9677,2770.94 9677,2839.7 9539.18,2977.52 9539.18,2998.35 ; v1(9659,1501) 9659,1705.84 9620,1744.84 ; VT2.10@9886.81,4447.34 9919,4447.34 9925,4441.34 9925,4352 9820.5,4247.5 9820.5,3959.5 9858,3922 9858,3813 9866,3805 9928,3805 10336.19,4213.19 VT3.10@10347.34,4213.19 10347.34,4207 9742,3601.66 9742,3553 9575,3386 VT10.10@9435.16,3386 ; v1(10074,701) 10074,652.66 VT5.10@10113.19,652.66 ; v1(10320,1279) 10299.64,1258.64 10299.64,1066.02 10320,1045.66 10347.34,1045.66 VT4.10@10347.34,1013.19 ; 7560,3290.16 7595,3255.16 ; 7595,3255.16 7615,3235.16 7615.02,3230 7616,2975 ; 7616,2975 7616,2928.07 7610,2571.11 8034.84,2146.26 VT14.10@8034.84,1614.94 ; 7955.52,1614.94 VT14.10@8034.84,1614.94 ; VT10.10@9435.16,3386 v1(9435.16,3150) 9435.16,3130.84 9539.18,3026.82 9539.18,2998.35 ; 9539.18,2998.35 9720,2817.52 9720,2715.99 9722,2713.99 9722,2531 9668.18,2477.18 9668.18,1793.02 9620,1744.84
  Bottom Layer w10: v1(6620,1059) 6713,1059 7143,1489 v1(7237,1489) 7379,1631 7794,1631 v1(7810.06,1614.94) ; v1(6650,4059) 6650,3956 v1(6766,3840) ; v1(7063,3365) 7099.06,3365 7475.06,2989 7575,2989 v1(7595,3009) ; v1(7445,2965.07) 7462,2982.07 7631.93,2982.07 v1(7639,2975) ; v1(7590,3290) 7650,3230 ; v1(7616,3230) 7650,3230 ; v1(7745,3230) 7650,3230 ; v1(7865.5,1704.96) 7882.54,1722 8629.5,1722 8702.5,1649 v1(8726,1649) ; v1(8565.16,3245) 8629.16,3181 9729,3181 9760,3150 ; v1(9659,1501) 9757,1501 9979,1279 v1(10320,1279) 10354.14,1279 10686.14,947 10790,947 10807,930 10807,860.36 10723.64,777 10317.03,777 10117.03,577 10025,577 10011,591 10011,638 v1(10074,701) ; 10296.46,3150 9760,3150 ; 7650,3230 7722,3158 9359.5,3158 9367.5,3150 v1(9435.16,3150) 9760,3150
FPGA_Q: "DB BOTTOM.20" "NS RIGHT.18" | length 2191.7
  Top Layer w10: 9450,483.96 9450,615.88 9822,987.88 9822,1684 v1(9834,1696)
  Bottom Layer w10: v1(9834,1696) 10153.31,1696 10242,1784.69 10485.31,1784.69 10520,1750 10603.54,1750
FPGA_RX: "NS RIGHT.16" BBB_DOWN.26 | length 9999.2
  Bottom Layer w10: BBB_DOWN.26@1302.91,2400 2568,2400 2624,2344 3535.42,2344 3564.86,2314.55 3627,2314.55 3656.45,2344 6306,2344 6355,2393 6472,2393 6523,2342 6601,2342 6652,2393 7038,2393 7095,2450 7145.76,2450 7183.76,2412 7385,2412 7400,2397 7578.85,2397 7589.85,2386 10656.92,2386 10657.92,2385 10657.92,1960 10647.92,1950 10603.54,1950
FPGA_SHCP: "DB BOTTOM.22" "NS RIGHT.29" | length 2523.7
  Top Layer w10: 9350,791.04 9350,1220 9381,1251 9381,1387 9350,1418 9350,2336 v1(9365,2351)
  Bottom Layer w10: v1(9365,2351) 9366,2350 10296.46,2350
FPGA_STCP: "DB BOTTOM.23" "NS RIGHT.28" | length 2417.5
  Top Layer w10: 9250,791.04 v1(9250,2015.82)
  Bottom Layer w10: v1(9250,2015.82) 9250,2100 9400,2250 10296.46,2250
FPGA_TX: "NS RIGHT.17" BBB_DOWN.24 | length 10141
  Bottom Layer w10: BBB_DOWN.24@1302.91,2500 1532,2500 1567,2535 3266,2535 3320,2481 6201,2481 6271,2411 6490,2411 6541,2360 6593.54,2360 6644.54,2411 6879,2411 6937,2469 7159,2469 7198,2430 7629,2430 7655,2404 10676,2404 10676,1880 10646,1850 10603.54,1850
FPGA_~CS1: "DB TOP.17" "NS RIGHT.40" | length 3716.8
  Top Layer w10: 7850,4516.04 7850,4445.51 7790,4385.51 7790,4084.3 7813,4061.3 7813,3578.09 v1(8116.09,3275)
  Bottom Layer w10: v1(8116.09,3275) 8865,3275 8941,3199 9921,3199 10172,3450 10296.46,3450
FPGA_~CS2: "DB LEFT.17" "NS RIGHT.27" | length 4007.5
  Top Layer w10: 6483.96,1850 6525,1850 6557,1882 v1(6557,1893)
  Bottom Layer w10: v1(6557,1893) 6557,1942 6601,1986 7062.46,1986 7105.46,1943 7204.49,1943 7226.49,1965 7371.37,1965 7391.37,1985 9390,1985 9555,2150 10296.46,2150
FPGA_~CS3: "DB RIGHT.17" "NS RIGHT.24" | length 1712.8
  Top Layer w10: v1(10379,1880) 10349,1910 10349,2428.68 10405,2484.68 10405,2540 10349,2596 10349,3220 10369,3240 10437,3240 10516.04,3160.96 10516.04,3150
  Bottom Layer w10: 10296.46,1850 10349,1850 v1(10379,1880)
FPGA_~CS4: "DB BOTTOM.17" "NS RIGHT.34" | length 3500.4
  Top Layer w10: 9150,483.96 9150,530 9285,665 9285,1286.31 9282,1289.31 9282,2066.47 9170,2178.47 v1(9170,2479)
  Bottom Layer w10: v1(9170,2479) 9324.09,2479 9581.55,2736.47 9581.55,2872.02 9610.54,2901 9836.45,2901 9887.45,2850 10296.46,2850
FPGA_~MR: "DB BOTTOM.19" "NS RIGHT.32" | length 3927.1
  Top Layer w10: 9350,483.96 9350,662 9399,711 9399,1340 v1(9425,1366) ; v1(10666,1496.87) 10673.64,1504.51 10673.64,1782 v1(10682,1782)
  Bottom Layer w10: v1(9425,1366) 9425,1418.62 9556.38,1550 10086,1550 10194.24,1441.76 10228.49,1441.76 10273.26,1397 10623,1397 10666,1440 v1(10666,1496.87) ; 10296.46,2650 10333,2650 10389,2594 10656,2594 10713,2537 10713,1813 v1(10682,1782)
FPGA_~OE: "DB TOP.18" "NS RIGHT.39" | length 4381.4
  Top Layer w10: 7750,4516.04 7750,4392 7715.31,4357.31 7715.31,4159.69 7747,4128 7747,4047 7759,4035 7759,3700 7776,3683 7776,3164 v1(7818,3122)
  Bottom Layer w10: v1(7818,3122) 7835,3139 9343,3139 9366.69,3115.31 10351,3115.31 10351,3200 10346.21,3204.79 10257.21,3204.79 10242,3220 10242,3340 10252,3350 10296.46,3350
FPGA_~PL: "DB BOTTOM.21" "NS RIGHT.31" | length 2808.6
  Top Layer w10: v1(9393,2482) 9413,2462 9413,2025 9395,2007 9395,1828.2 9628,1595.2 9628,1269 9450,1091 9450,791.04
  Bottom Layer w10: v1(9393,2482) 9636,2482 9704,2550 10296.46,2550
FPGA_~WE1: "DB TOP.19" "NS RIGHT.38" | length 5857.3
  Top Layer w10: v1(7300,2927) 7300,2952 7286,2966 7286,3951 7428,4093 7428,4547 7454,4573 7640,4573 7650,4563 7650,4516.04 ; v1(8824,2811) 9041,3028 v1(9041,3269)
  Bottom Layer w10: v1(7300,2927) 7391,2836 7446.75,2836 7515.75,2767 8643,2767 8687,2811 v1(8824,2811) ; v1(9041,3269) 9061,3249 9306,3249 9324,3267 9444,3267 9489,3222 9901,3222 10178,3499 10340,3499 10351,3488 10351,3315 10337,3315 10296.46,3274.46 10296.46,3250
FPGA_~WE2: "DB LEFT.18" "NS RIGHT.26" | length 4501.4
  Top Layer w10: 6483.96,1750 6536,1750 v1(6571,1715)
  Bottom Layer w10: v1(6571,1715) 6342,1715 6342,1785 6563.46,1785 6614.55,1836.08 6614.55,1898.55 6631.31,1915.31 6842,1915.31 6851.01,1924.33 7223,1924.33 7235.67,1937 9454,1937 9567,2050 10296.46,2050
FPGA_~WE3: "DB RIGHT.18" "NS RIGHT.23" | length 2399.6
  Top Layer w10: v1(10417,3307) 10474,3250 10516.04,3250
  Bottom Layer w10: 10296.46,1750 10423,1750 10459,1714 10684,1714 10734,1764 10734,3211 10638,3307 v1(10417,3307)
FPGA_~WE4: "DB BOTTOM.18" "NS RIGHT.33" | length 3312.5
  Top Layer w10: 9250,483.96 9250,447 9267.42,429.58 9384.69,429.58 9403.1,447.99 9403.1,600 9689,885.9 9689,1970 9740,2021 9740,2733.3 9738.69,2734.61 9738.69,2813.69 9750,2825 9760,2825 v1(9770,2835)
  Bottom Layer w10: v1(9770,2835) 9855,2750 10296.46,2750